# EAGLE board untitled (EAGLE 9.6.2)
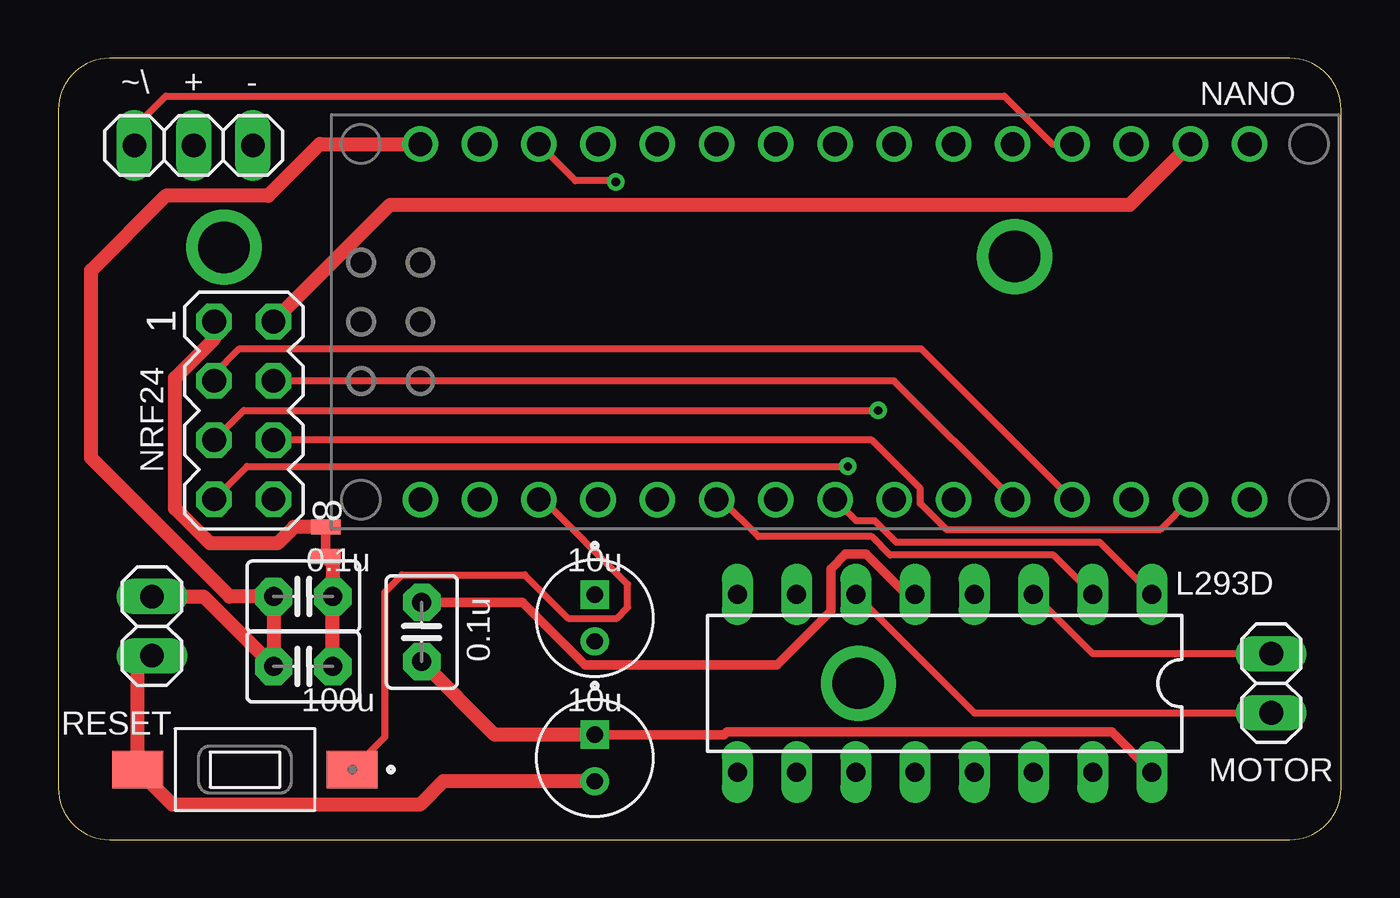
[diagram p0: board, top side]
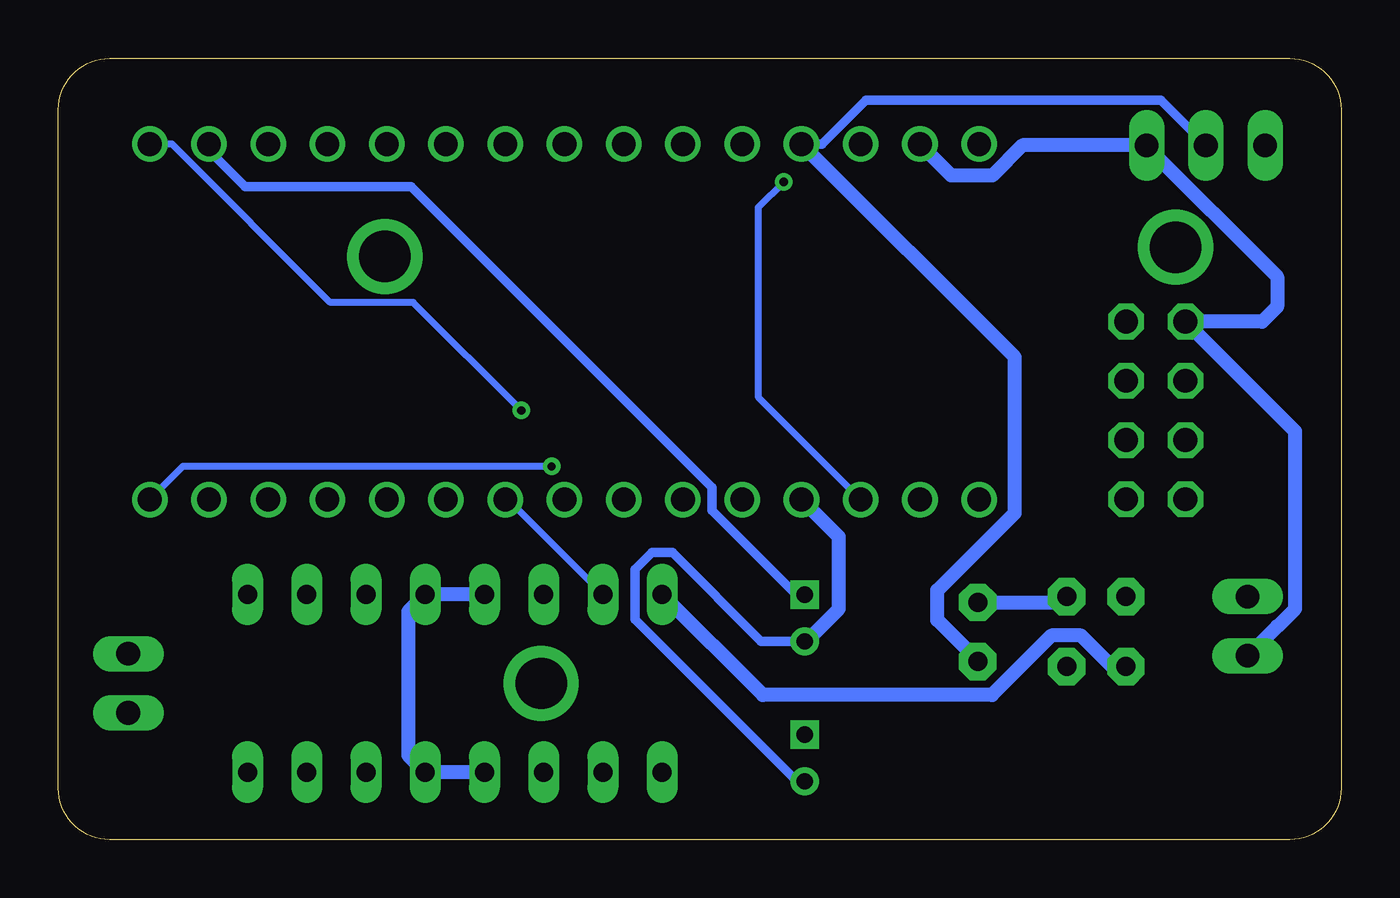
[diagram p1: board, bottom side, seen from below]

Size 55 x 33.5 mm. Coordinates in mm from the lower left corner, seen from the top.
Outline: 55,2.2 55,31.3 arc90 52.8,33.5 2.2,33.5 arc90 0,31.3 0,2.2 arc90 2.2,0 52.8,0 arc90 55,2.2
Copper layers (1*16): Top 0.035mm / dielectric 1.5mm / Bottom 0.035mm
Design rules "PCBway": minimum track width 6mil, minimum drill 0.3mm, track to track 0.205mm, track to pad 0.205mm, pad to pad 0.205mm, via to via 0.205mm, smd to smd 8mil, copper to edge 40mil, drill to drill 8mil, minimum pad ring 10mil, minimum via ring 8mil, stop-mask expansion 4mil, vias tented up to drill 25mil, thermal gap 10mil

## Footprints (pad centres in the part's own frame; a part is rotated, then mirrored left to right if it is on the bottom)
1X02 = drill 1.016 long: 1 -1.27,0; 2 1.27,0
CAPPRD200W50D550H1250 = drill 0.7 square: 1 -1,0 | drill 0.7: 2 1,0
C2.5-3 = drill 0.813 pad 1.6 octagon: 1 -1.27,0; 2 1.27,0
DIL16 = drill 0.813 long: 1 -8.89,-3.81; 2 -6.35,-3.81; 3 -3.81,-3.81; 4 -1.27,-3.81; 5 1.27,-3.81; 6 3.81,-3.81; 7 6.35,-3.81; 8 8.89,-3.81; 9 8.89,3.81; 10 6.35,3.81; 11 3.81,3.81; 12 1.27,3.81; 13 -1.27,3.81; 14 -3.81,3.81; 15 -6.35,3.81; 16 -8.89,3.81
NANO = drill 1.016: 1 -7.62,17.78; 2 -7.62,15.24; 3 -7.62,12.7; 4 -7.62,10.16; 5 -7.62,7.62; 6 -7.62,5.08; 7 -7.62,2.54; 8 -7.62,0; 9 -7.62,-2.54; 10 -7.62,-5.08; 11 -7.62,-7.62; 12 -7.62,-10.16; 13 -7.62,-12.7; 14 -7.62,-15.24; 15 -7.62,-17.78; 16 7.62,-17.78; 17 7.62,-15.24; 18 7.62,-12.7; 19 7.62,-10.16; 20 7.62,-7.62; 21 7.62,-5.08; 22 7.62,-2.54; 23 7.62,0; 24 7.62,2.54; 25 7.62,5.08; 26 7.62,7.62; 27 7.62,10.16; 28 7.62,12.7; 29 7.62,15.24; 30 7.62,17.78
NET_BRIDGE = smd 0.635 x 1.27: P$1 -0.635,0; P$2 0.635,0
MA04-2 = drill 1.016 octagon: 1 -3.81,-1.27; 2 -3.81,1.27; 3 -1.27,-1.27; 4 -1.27,1.27; 5 1.27,-1.27; 6 1.27,1.27; 7 3.81,-1.27; 8 3.81,1.27
SW_1437566-4 = smd 2.18 x 1.6: 1 -4.6,0; 2 4.6,0
1X03 = drill 1.016 long: 1 -2.54,0; 2 0,0; 3 2.54,0

## Placement (x,y rotation side)
BATTERY_JST  [1X02]  4.01,9.15 270 top
C1  10u  [CAPPRD200W50D550H1250]  23,3.5 270 top
C2  10u  [CAPPRD200W50D550H1250]  23,9.5 270 top
C3  .1u  [C2.5-3]  10.5,7.42 0 top
C4  100u  [C2.5-3]  10.5,10.42 0 top
C5  .1u  [C2.5-3]  15.58,8.9 90 top
IC1  L293D  [DIL16]  38,6.7 180 top
J1  NANO_FOOTPRINT  [NANO]  33.3,22.2 90 top
MOTOR_JST  [1X02]  52,6.7 270 top
NET_BRIDGE1  NET_BRIDGE  [NET_BRIDGE]  11.47,12.77 270 top
NRF24L01  [MA04-2]  7.95,18.4 270 top
S1  1437566-4  [SW_1437566-4]  8,3 180 top
SERVO_JST  [1X03]  5.8,29.77 0 top

## Library data of the parts
BATTERY_JST MOTOR_JST SERVO_JST = pinhead
C1 C2 = UVR1E100MDD; DESCRIPTION: 10 µF 25 V Aluminum Electrolytic Capacitors Radial, Can - 2000 Hrs @ 85°C; DIGI-KEY_PART_NUMBER: UVR1E100MDD1TA-ND; MF: Nichicon; MP: UVR1E100MDD; PACKAGE: Radial Nichicon; PURCHASE-URL: https://pricing.snapeda.com/search/part/UVR1E100MDD/?ref=eda
C3-C5 = capacitor-wima
IC1 = st-microelectronics; MPN: L293D; OC_FARNELL: 9589619; OC_NEWARK: 56P8249
J1 = SparkFun-Boards
NET_BRIDGE1 = PiB_power_symbols
NRF24L01 = con-lstb; OC_FARNELL: unknown; OC_NEWARK: unknown
S1 = 1437566-4; COMMENT: 1437566-4; CONFIGURATION_POLE-THROW: Single Pole - Single Throw; CONTACT_CURRENT_RATING: 50 mA; DESCRIPTION: Tactile Switch SPST-NO Top Actuated Surface Mount; DIGI-KEY_PART_NUMBER: 2266-1437566-4TR-ND; MF: TE Connectivity; MP: 1437566-4; PACKAGE: None

## Nets
3.3V: C2.1 J1.17 NRF24L01.2
5V: C1.1 C5.1 IC1.16 J1.27 SERVO_JST.2
CE: J1.12 NRF24L01.3
CSN: J1.11 NRF24L01.4
EN_A: IC1.1 J1.8
GND: BATTERY_JST.2 C1.2 C2.2 J1.4 J1.29 NET_BRIDGE1.P$1 NRF24L01.1 S1.2 SERVO_JST.3
IN_1: IC1.2 J1.6
IN_2: IC1.7 J1.9
MISO: J1.15 NRF24L01.7
MOSI: J1.14 NRF24L01.6
NGND: C3.2 C4.2 C5.2 IC1.4 IC1.5 IC1.12 IC1.13 NET_BRIDGE1.P$2
OP_A: IC1.3 MOTOR_JST.1
OP_B: IC1.6 MOTOR_JST.2
RESET: J1.3 J1.28 S1.1
SCK: J1.16 NRF24L01.5
SERVO: J1.19 SERVO_JST.1
VCC: BATTERY_JST.1 C3.1 C4.1 IC1.8 J1.30

## Tracks (layer width: path | path; a pad name or v marks a point on that pad's centre or on a via)
3.3V
  Top 0.61: NRF24L01.2 14.23,27.22 45.94,27.22 J1.17
  Bottom 0.406: C2.1 23.36,10.5 26.98,14.12 26.98,15.1 39.88,28 47,28 48.54,29.54 J1.17
5V
  Top 0.406: C1.1 28.55,4.5 28.67,4.62 45.16,4.62 IC1.16
  Top 0.61: C1.1 18.71,4.5 C5.1
  Bottom 0.406: J1.27 22.25,29.82 20.37,31.7 7.73,31.7 SERVO_JST.2
  Bottom 0.61: C5.1 15.58,7.68 17.31,9.41 17.31,10.69 14,14 14,20.68 J1.27
CE
  Top 0.305: NRF24L01.3 6.68,19.97 7.76,21.05 36.99,21.05 J1.12
CSN
  Top 0.305: J1.11 35.83,19.67 NRF24L01.4
EN_A
  Top 0.305: IC1.1 44.65,12.75 35.93,12.75 35.01,13.67 34.21,13.67 J1.8
GND
  Top 0.61: C1.2 16.5,2.5 15.5,1.5 4.9,1.5 S1.2 3.4,7.27 BATTERY_JST.2 | NRF24L01.1 6.68,21.47 5.01,19.8 5.01,14.19 6.5,12.7 9.4,12.7 10.11,13.4 NET_BRIDGE1.P$1
  Bottom 0.406: C2.2 24.87,8.5 28.67,12.3 29.55,12.3 30.27,11.58 30.27,9.44 23.33,2.5 C1.2
  Bottom 0.61: C2.2 22.93,8.5 21.54,9.89 21.54,12.98 J1.4 | J1.29 16.71,28.47 14.96,28.47 13.67,29.77 SERVO_JST.3 8.34,29.72 2.75,24.13 2.75,22.85 3.39,22.21 NRF24L01.1 1.98,17.51 1.98,9.89 2.72,9.15 2.74,9.15 BATTERY_JST.2
IN_1
  Top 0.305: IC1.2 42.66,12.2 35.66,12.2 34.88,12.99 30.01,12.99 28.42,14.58 J1.6
IN_2
  Bottom 0.305: IC1.7 35.72,14.58 J1.9
MISO  (via drill 0.35)
  Top 0.305: NRF24L01.7 8.09,16 v33.85,16
  Bottom 0.305: v33.85,16 49.66,16 J1.15
MOSI
  Top 0.305: J1.14 47.26,13.3 38.07,13.3 36.96,14.41 36.96,15.04 34.87,17.13 NRF24L01.6
N$1  (via drill 2.2 pad 3)
  other vias: 41,25
N$2  (via drill 2.2 pad 3)
  other vias: 34.3,6.7
N$3  (via drill 2.2 pad 3)
  other vias: 7.1,25.4
NGND
  Top 0.406: C5.2 19.9,10.17 22.58,7.49 23.42,7.49 23.43,7.5 30.81,7.5 33.12,9.81 33.12,11.61 33.75,12.24 34.63,12.24 36.36,10.51 IC1.5
  Top 0.61: C3.2 C4.2 11.77,11.84 NET_BRIDGE1.P$2
  Bottom 0.61: IC1.12 IC1.13 40,3.62 40,9.78 IC1.4 IC1.5 | C5.2 12.02,10.17 C4.2
OP_A
  Top 0.305: MOTOR_JST.1 44.35,7.97 IC1.3
OP_B
  Top 0.305: IC1.6 39.27,5.43 MOTOR_JST.2
RESET  (via drill 0.35)
  Top 0.305: S1.1 14,4.4 14,10.62 14.73,11.35 20,11.35 21.85,9.49 23.95,9.49 24.41,9.95 24.41,10.95 20.77,14.58 J1.3 | J1.28 22.17,28.25 23.85,28.25 v23.9,28.2
  Bottom 0.305: v23.9,28.2 25,27.1 25,18.98 J1.3
SCK  (via drill 0.35)
  Top 0.305: NRF24L01.5 7.95,18.4 v35.15,18.4
  Bottom 0.305: v35.15,18.4 39.78,23.04 43.34,23.04 50.12,29.82 J1.16
SERVO
  Top 0.305: J1.19 42.61,29.82 40.55,31.88 4.61,31.88 3.26,30.53 SERVO_JST.1
VCC
  Top 0.61: BATTERY_JST.1 6.23,10.42 C3.1 C4.1 7.35,10.42 1.4,16.37 1.4,24.4 4.61,27.61 9,27.61 11.21,29.82 J1.30
  Bottom 0.61: C3.1 9.83,7.42 11.16,8.75 12.42,8.75 14.97,6.2 24.8,6.2 IC1.8

## Text on the board
tPlace: ~\ | + | - | NANO | NRF24 | 0.1u | 10u | L293D | 0.1u | 100u | 10u | RESET | MOTOR